# EAGLE board Watch-It-BOTTOM (EAGLE 9.5.1)
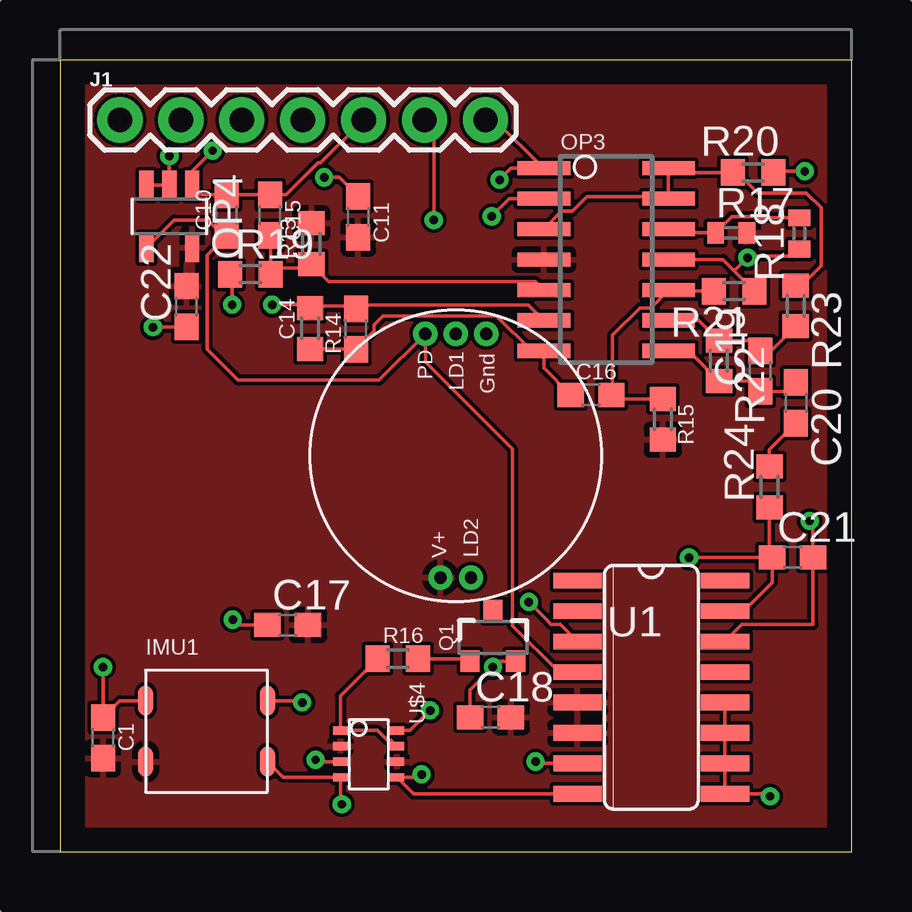
[diagram p0: board, top side]
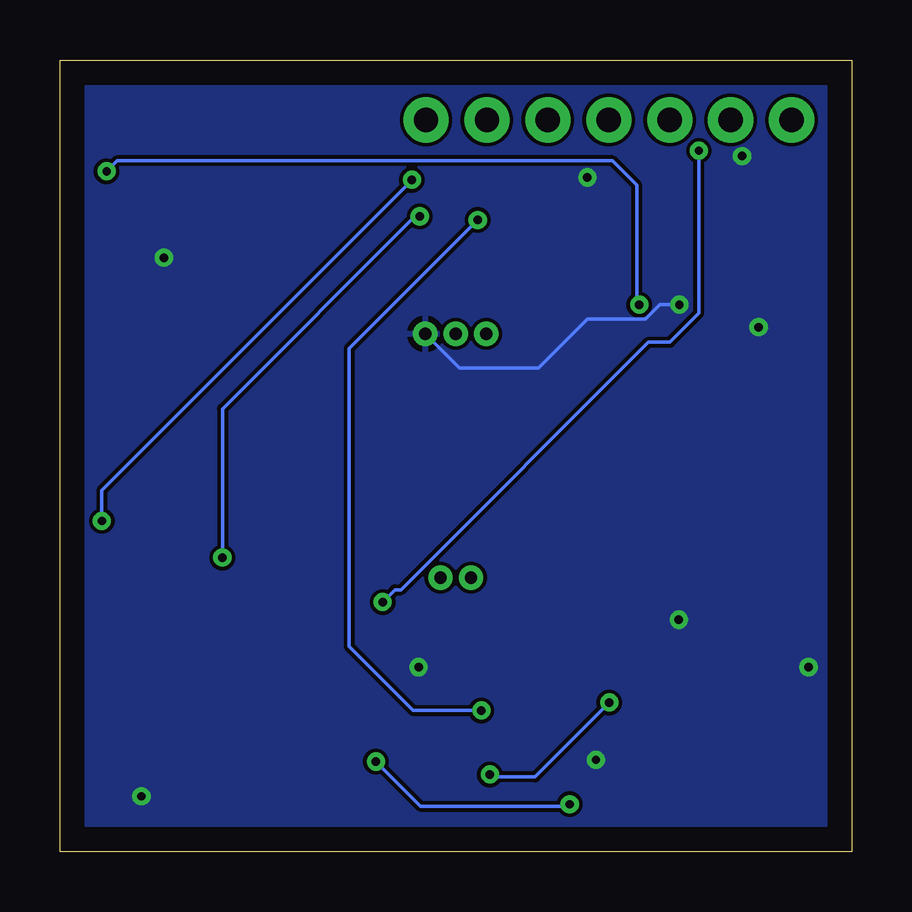
[diagram p1: board, bottom side, seen from below]

Size 33 x 33 mm. Coordinates in mm from the lower left corner, seen from the top.
Outline: 0,0 33,0 33,33 0,33 0,0
Copper layers (1*16): Top 0.035mm / dielectric 1.5mm / Bottom 0.035mm
Design rules "default": minimum track width 6mil, minimum drill 0.35mm, track to track 6mil, track to pad 6mil, pad to pad 6mil, via to via 6mil, smd to smd 6mil, copper to edge 40mil, drill to drill 6mil, minimum pad ring 10mil, minimum via ring 8mil, stop-mask expansion 4mil, vias tented up to drill 0mil, thermal gap 10mil

## Footprints (pad centres in the part's own frame; a part is rotated, then mirrored left to right if it is on the bottom)
C0603 = smd 1.1 x 1: 1 -0.85,0; 2 0.85,0
LSM6DS3_CAST = smd 0.635 x 1.27: 1 -2.54,1.27; 2 -2.54,-1.27; 3 2.54,-1.27; 4 2.54,1.27
1X07 = drill 1.016 pad 1.88: 1 0,0; 2 2.54,0; 3 5.08,0; 4 7.62,0; 5 10.16,0; 6 12.7,0; 7 15.24,0
SO14 = smd 0.6 x 2.2: 1 -3.81,-2.6; 2 -2.54,-2.6; 3 -1.27,-2.6; 4 0,-2.6; 5 1.27,-2.6; 6 2.54,-2.6; 7 3.81,-2.6; 8 3.81,2.6; 9 2.54,2.6; 10 1.27,2.6; 11 0,2.6; 12 -1.27,2.6; 13 -2.54,2.6; 14 -3.81,2.6
SOT23-5 = smd 0.6 x 1.2: 1 -0.95,-1.306; 2 0,-1.306; 3 0.95,-1.306; 4 0.95,1.306; 5 -0.95,1.306
SOT23-3 = smd 0.8 x 0.9: 1 -0.95,-1; 2 0.95,-1; 3 0,1.1
R0603 = smd 1 x 1.1: 1 -0.85,0; 2 0.85,0
R0402 = smd 0.7 x 0.9: 1 -0.65,0; 2 0.65,0
SO16 = smd 0.66 x 2.032: 1 -4.445,-3.073; 2 -3.175,-3.073; 3 -1.905,-3.073; 4 -0.635,-3.073; 5 0.635,-3.073; 6 1.905,-3.073; 7 3.175,-3.073; 8 4.445,-3.073; 9 4.445,3.073; 10 3.175,3.073; 11 1.905,3.073; 12 0.635,3.073; 13 -0.635,3.073; 14 -1.905,3.073; 15 -3.175,3.073; 16 -4.445,3.073
PPG.MODULE.2 = drill 0.508 pad 0.94: GND 1.27,5.08; LD1 0,5.08; LD2 0.635,-5.08; PD -1.27,5.08; V+ -0.635,-5.08
SOT-23-8 = smd 0.35 x 0.6: 1 -0.991,-1.176; 2 -0.341,-1.176; 3 0.309,-1.176; 4 0.959,-1.176; 5 0.959,1.176; 6 0.309,1.176; 7 -0.341,1.176; 8 -0.991,1.176

## Placement (x,y rotation side)
C1  100n  [C0603]  1.79,4.74 270 top
C10  100n  [C0603]  6.95,26.53 90 top
C11  100n  [C0603]  12.44,26.46 270 top
C14  2.2n  [C0603]  12.33,21.78 90 top
C15  2.2u  [C0603]  8.75,26.53 270 top
C16  2.2u  [C0603]  22.14,19.04 0 top
C17  100n  [C0603]  9.49,9.44 0 top
C18  100n  [C0603]  17.95,5.6 0 top
C19  2.2n  [C0603]  29.2,20.03 90 top
C20  22u  [C0603]  30.67,18.71 270 top
C21  22n  [C0603]  30.55,12.26 0 top
C22  100n  [C0603]  5.27,22.72 90 top
IMU1  LSM6DS3_CAST  [LSM6DS3_CAST]  6.11,5.02 0 top
J1  [1X07]  2.5,30.5 0 top
OP3  [SO14]  22.77,24.68 270 top
OP4  [SOT23-5]  4.56,26.48 180 top
Q1  [SOT23-3]  18.05,8.93 0 top
R13  220k  [R0603]  10.48,25.34 90 top
R14  10M  [R0603]  10.43,21.81 270 top
R15  220k  [R0603]  25.14,18.02 270 top
R16  [R0603]  14.09,8.04 0 top
R17  10k  [R0402]  27.98,25.8 0 top
R18  10k  [R0402]  30.82,25.77 90 top
R19  220k  [R0603]  7.94,24.07 0 top
R20  1M  [R0603]  28.89,28.31 0 top
R21  220k  [R0603]  28.11,23.36 180 top
R22  10M  [R0603]  27.47,20.46 270 top
R23  1M  [R0603]  30.67,22.75 270 top
R24  10k  [R0603]  29.58,15.2 90 top
U1  AD5242-SO16  [SO16]  24.65,6.85 270 top
U$3  [PPG.MODULE.2]  16.5,16.5 0 top
U$4  AD5171  [SOT-23-8]  12.87,4.05 270 top

## Library data of the parts
C1 C10 C11 C14-C22 R13-R24 = LinnesLab-Passives
IMU1 = LinnesLab-Sensors
J1 U$3 = LinnesLab-Connectors
OP3 OP4 = LinnesLab-AnalogIC
Q1 = LinnesLab-DiscreteSemi
U1 U$4 = LinnesLab-DigitalIC

## Nets
3.3V: C1.2 C11.2 C17.2 C18.2 C22.2 IMU1.2 OP3.4 OP4.5 R13.2 R15.2 R17.2 U1.5 U1.6 U$3.V+ U$4.2 U$4.6
A6/TIA: C10.2 C15.1 J1.5 OP4.1 U1.3
A7/PPG: C21.2 J1.7 OP3.1 U1.14
D29/LED.CTRL: J1.6 U$4.8
G.A1: U1.2
G.A2: U1.16
G.O1: U1.1
G.O2: U1.13
G.W2: C21.1 OP3.2 R24.1 U1.15
GND: C1.1 C11.1 C17.1 C18.1 C22.1 IMU1.1 OP3.11 OP4.2 OP4.3 Q1.2 R18.1 R19.1 R21.1 U1.9 U1.10 U1.11 U1.12 U$3.GND U$4.3
LED: Q1.3
LED.C: U$3.LD1
N$8: Q1.1 R16.2
N$9: R16.1 U$4.1 U$4.7
N$10: OP3.12 R17.1 R18.2
N$13: C15.2 OP3.5 R13.1 R19.2
N$15: C14.2 OP3.6 R14.1 R20.2
N$16: C14.1 C16.1 OP3.7 R14.2
N$17: C16.2 OP3.10 R15.1 R21.2
N$18: C19.2 OP3.9 R22.1 R23.2
N$19: C19.1 C20.1 OP3.8 R22.2
N$20: C20.2 R24.2
PD.C: C10.1 OP4.4 U1.4 U$3.PD
SCL: IMU1.3 U1.7 U$4.4
SDA: IMU1.4 U1.8 U$4.5
VREF: OP3.3 OP3.13 OP3.14 R20.1 R23.1

## Tracks (layer width: path | path; a pad name or v marks a point on that pad's centre or on a via)
3.3V
  Top 0.152: 3.57,3.89 IMU1.2 | C11.2 12.41,25.78 | C17.2 10.49,9.44 | 12.63,25.59 12.84,25.39 | 12.45,25.18 12.64,25.37
  pour Top: 0.65,32.4 32.4,32.4 32.4,0.37 0.6,0.37
A6/TIA  (via drill 0.35)
  Top 0.152: U1.3 20.87,9.46 20.47,9.46 20.34,9.6 20.34,9.62 v19.55,10.4 | v6.37,29.22 5.51,28.36 OP4.1 5.92,27.38 C10.2 8.5,27.38 C15.1 9.43,27.38 10.76,28.71 10.87,28.71 J1.5
  Bottom 0.152: v19.55,10.4 19.04,10.91 18.79,10.91 8.46,21.24 7.57,21.24 6.37,22.44 v6.37,29.22
A7/PPG  (via drill 0.35)
  Top 0.152: U1.14 28.44,9.46 31.4,9.46 C21.2 31.4,13.64 v31.26,13.78 | OP3.1 20.16,28.49 | 20.16,28.49 18.81,28.49 v18.33,28 | J1.7 18.14,30.5 20.16,28.49
  Bottom 0.152: v18.33,28 18.33,27.98 31.26,15.05 v31.26,13.78
D29/LED.CTRL  (via drill 0.35)
  Top 0.152: J1.6 15.59,30.5 v15.59,26.33 | v15.43,5.88 14.59,5.04 U$4.8
  Bottom 0.152: v15.59,26.33 20.94,20.97 20.94,8.55 18.28,5.88 v15.43,5.88
G.W2  (via drill 0.35)
  Top 0.152: R24.1 29.58,12.37 C21.1 29.7,12.18 | 29.7,12.18 29.7,11.21 28.51,10.02 U1.15 | OP3.2 18.73,27.22 v18,26.48 | v26.23,12.26 29.62,12.26 29.7,12.18
  Bottom 0.152: v18,26.48 18.2,26.48 26.23,18.45 v26.23,12.26
GND  (via drill 0.35)
  Top 0.152: IMU1.1 2.49,6.29 C1.1 v1.79,7.69 | Q1.2 18.29,7.93 v18.05,7.69 17.1,6.73 C18.1 | U$4.3 10.74,3.74 v10.66,3.83 | OP4.3 OP4.2 v4.56,29 | OP3.11 27.64,24.68 28.06,24.25 | 28.06,24.25 R21.1 | 28.06,24.25 28.16,24.25 v28.67,24.75 28.73,24.82 30.52,24.82 R18.1 | U1.12 U1.11 U1.10 U1.9 29.5,2.4 v29.61,2.3 | R19.1 7.18,23.98 v7.18,22.8 | C17.1 7.43,9.44 v7.2,9.67 | v3.88,21.86 3.89,21.87 C22.1 | C11.1 11.63,28.11 v11.01,28.11
  Bottom 0.152: U$3.GND 16.35,20.16 13.05,20.16 11.01,22.19 8.6,22.19 7.99,22.8 v7.18,22.8
  pour Bottom: 32.88,32.88 32.88,0.04 0.19,0.04 0.19,32.88
N$8
  Top 0.152: Q1.1 16.99,8.04 R16.2
N$9
  Top 0.152: R16.1 11.69,6.49 U$4.1 13.24,5.04 13.65,4.64 13.8,4.64 U$4.7
N$10
  Top 0.152: OP3.12 25.52,25.8 R17.1 28.01,26.47 29.07,26.47 29.13,26.42 R18.2
N$13
  Top 0.152: OP3.5 19.82,23.76 11.2,23.76 R13.1 10.31,24.32 9.04,24.32 R19.2 8.79,25.64 C15.2
N$15  (via drill 0.35)
  Top 0.152: R14.1 10.48,22.66 10.4,22.73 | 10.4,22.73 12.23,22.73 C14.2 12.49,22.79 19.53,22.79 OP3.6 | R20.2 29.8,28.36 v31.05,28.36 | 10.4,22.73 10.34,22.8 v8.85,22.8
  Bottom 0.152: v31.05,28.36 30.62,28.79 9.97,28.79 8.95,27.77 8.95,22.9 v8.85,22.8
N$16
  Top 0.152: R14.2 12.31,20.96 C14.1 13.1,21.69 13.1,21.95 13.48,22.33 18.2,22.33 19.67,20.87 OP3.7 20.17,20.15 C16.1
N$17
  Top 0.152: C16.2 23.03,18.99 | 23.03,18.99 23.15,18.87 R15.1 | R21.2 25.42,23.36 OP3.10 24.63,22.67 24.18,22.67 23.03,21.52 23.03,18.99
N$18
  Top 0.152: OP3.9 26.65,22.14 R22.1 28.77,21.31 C19.2 29.66,20.88 R23.2
N$19
  Top 0.152: OP3.8 26.22,20.87 R22.2 28.77,19.61 C19.1 30.28,19.18 C20.1
N$20
  Top 0.152: R24.2 29.58,16.77 C20.2
PD.C
  Top 0.152: U1.4 20.79,7.48 18.86,9.41 18.86,16.78 15.23,20.41 U$3.PD 13.3,19.65 7.43,19.65 6.14,20.94 6.14,24.87 6.88,25.61 | C10.1 6.88,25.61 | OP4.4 4.76,26.33 6.16,26.33 6.88,25.61
SCL  (via drill 0.35)
  Top 0.152: IMU1.3 9.3,3.09 U$4.4 11.69,2.03 v11.75,1.97 | U1.7 19.9,3.67 v19.83,3.75
  Bottom 0.152: v19.83,3.75 17.97,1.89 11.83,1.89 v11.75,1.97
SDA  (via drill 0.35)
  Top 0.152: U1.8 14.73,2.4 U$4.5 14.96,3.09 v15.08,3.21 | IMU1.4 10.02,6.29 v10.1,6.21
  Bottom 0.152: v10.1,6.21 13.2,3.11 14.98,3.11 v15.08,3.21
VREF
  Top 0.152: OP3.13 25.37,27.29 | 25.37,27.29 OP3.14 25.55,28.31 R20.1 28.24,28.31 29.1,27.45 31.12,27.45 31.73,26.84 31.73,24.42 30.91,23.6 R23.1 | OP3.3 20.91,26.69 21.37,26.69 21.97,27.29 25.37,27.29